# EAGLE board DCO (EAGLE 6.5.0)
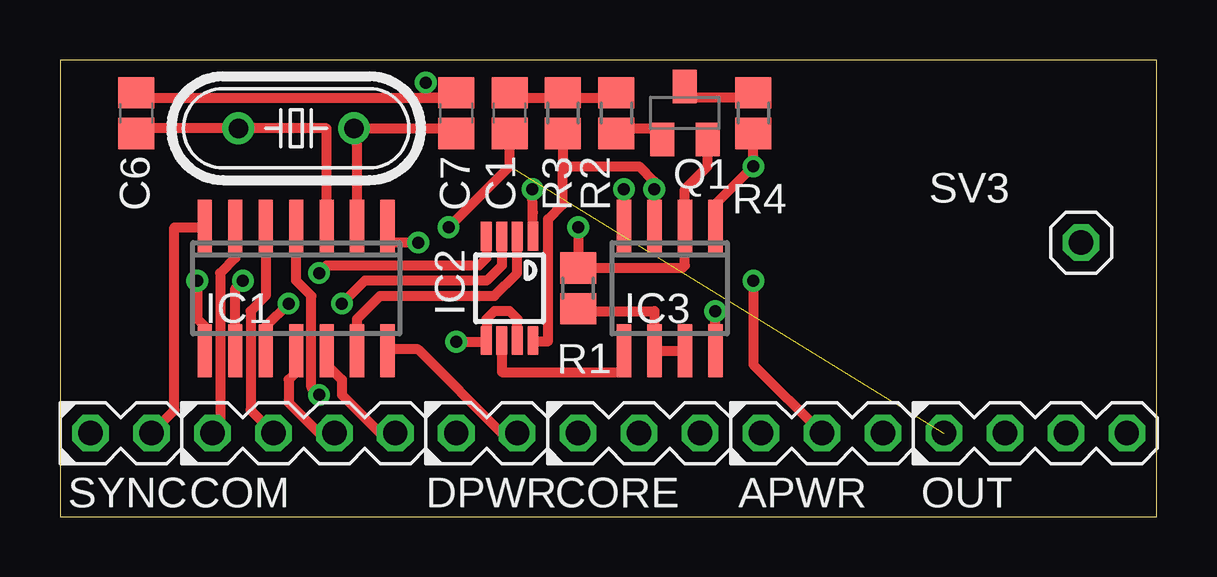
[diagram p0: board, top side]
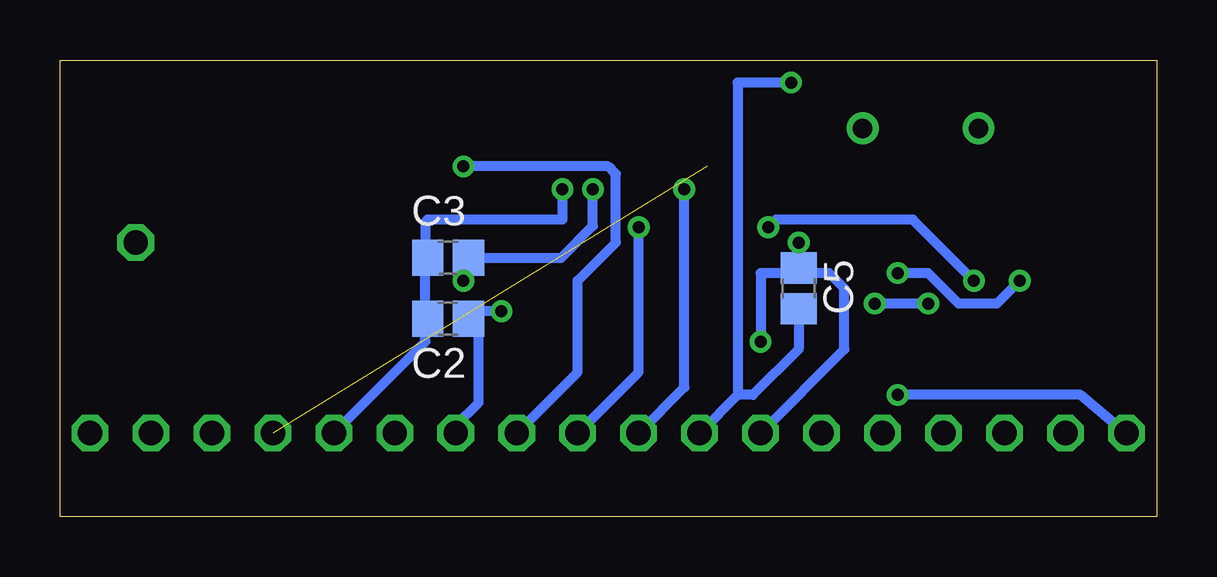
[diagram p1: board, bottom side, seen from below]

Size 45.7 x 19.04 mm. Coordinates in mm from the lower left corner, seen from the top.
Outline: 0,0 45.7,0 45.7,19.04 0,19.04 0,0
Copper layers (1*16): Top 0.035mm / dielectric 1.5mm / Bottom 0.035mm
Design rules "default": minimum track width 10mil, minimum drill 24mil, track to track 8mil, track to pad 8mil, pad to pad 8mil, via to via 8mil, smd to smd 8mil, copper to edge 40mil, drill to drill 8mil, minimum pad ring 10mil, minimum via ring 8mil, stop-mask expansion 4mil, vias tented up to drill 0mil, thermal gap 10mil

## Footprints (pad centres in the part's own frame; a part is rotated, then mirrored left to right if it is on the bottom)
MA03-1J = drill 1.016 octagon: 1 -2.54,0; 2 0,0; 3 2.54,0
C0805 = smd 1.3 x 1.5: 1 -0.85,0; 2 0.85,0
MA04-1J = drill 1.016 octagon: 1 -3.81,0; 2 -1.27,0; 3 1.27,0; 4 3.81,0
MA02-1J = drill 1.016 octagon: 1 -2.54,0; 2 0,0
SO14J = smd 0.6 x 2.2: 1 -3.81,-2.6; 2 -2.54,-2.6; 3 -1.27,-2.6; 4 0,-2.6; 5 1.27,-2.6; 6 2.54,-2.6; 7 3.81,-2.6; 8 3.81,2.6; 9 2.54,2.6; 10 1.27,2.6; 11 0,2.6; 12 -1.27,2.6; 13 -2.54,2.6; 14 -3.81,2.6
UMAX8J = smd 0.45 x 1.2: 1 -0.975,-2.175; 2 -0.325,-2.175; 3 0.325,-2.175; 4 0.975,-2.175; 5 0.975,2.175; 6 0.325,2.175; 7 -0.325,2.175; 8 -0.975,2.175
SO08 = smd 0.6 x 2.2: 1 -1.905,-2.6; 2 -0.635,-2.6; 3 0.635,-2.6; 4 1.905,-2.6; 5 1.905,2.6; 6 0.635,2.6; 7 -0.635,2.6; 8 -1.905,2.6
MA05-1J = drill 1.016 octagon: 1 -5.08,0; 2 -2.54,0; 3 0,0; 4 2.54,0; 5 5.08,0
SOT23-BEC = smd 1 x 1.4: B -0.95,-1.1; C 0,1.1; E 0.95,-1.1
HC49/S = drill 0.813: 1 -2.413,0; 2 2.413,0
R0805 = smd 1.3 x 1.5: 1 -0.85,0; 2 0.85,0
MA01-1J = drill 1.016 octagon: 1 0,0

## Placement (x,y rotation side)
APWR  [MA03-1J]  31.75,3.49 0 top
C1  270pF  [C0805]  18.73,16.83 90 top
C2  100nF  [C0805]  29.53,8.26 180 bottom
C3  100nF  [C0805]  29.53,10.79 0 bottom
C5  100nF  [C0805]  14.92,9.53 270 bottom
C6  [C0805]  3.17,16.83 270 top
C7  [C0805]  16.51,16.83 270 top
COM  [MA04-1J]  10.16,3.49 0 top
CORE  [MA03-1J]  24.13,3.49 0 top
DPWR  [MA02-1J]  19.05,3.49 0 top
IC1  PIC16F18325SL  [SO14J]  9.84,9.53 180 top
IC2  MAX5216  [UMAX8J]  18.73,9.53 180 top
IC3  TL082D  [SO08]  25.4,9.53 180 top
OUT  [MA04-1J]  40.64,3.49 0 top
PGM  [MA05-1J]  -34.29,-22.86 0 top  (outside the outline)
Q1  MMBT3906  [SOT23-BEC]  26.04,16.83 0 top
Q2  [HC49/S]  9.84,16.19 0 top
R1  100k  [R0805]  21.59,9.53 90 top
R2  1k  [R0805]  23.18,16.83 90 top
R3  10k  [R0805]  20.95,16.83 90 top
R4  2R2  [R0805]  28.89,16.83 90 top
SV3  [MA01-1J]  42.55,11.43 0 top
SYNC  [MA02-1J]  3.81,3.49 0 top

## Library data of the parts
APWR COM CORE OUT PGM = joakim; OC_FARNELL: unknown; OC_NEWARK: unknown
C1-C3 C5-C7 R1-R4 = resistor
DPWR IC2 SV3 SYNC = joakim
IC1 = joakim; MF: MICROCHIP; MPN: PIC16F676-I/SL; OC_FARNELL: 9760520; OC_NEWARK: 92C4557
IC3 = linear
Q1 = transistor-pnp
Q2 = crystal; OC_FARNELL: 1667008; OC_NEWARK: unknown

## Nets
+5V: C5.1 DPWR.1 IC1.1 IC2.5 IC2.7
+15V: APWR.1 C2.1 IC3.8
-15V: APWR.2 C3.2 IC3.4
AGND: APWR.3 C2.2 C3.1 IC2.8 IC3.3 R3.1
CAP1: CORE.2 IC3.2 Q1.E R1.2
CAP2: CORE.3 IC3.1 R4.1
CHARGE_VOLTAGE: IC2.6 IC3.5
CTRL_SPI_CLOCK: COM.1 IC1.6
CTRL_SPI_IN: COM.2 IC1.5
CTRL_SPI_OUT: COM.4 IC1.12
DAC_CS: IC1.13 IC2.2
DAC_REF: CORE.1 IC2.1
DAC_SPI: IC1.8 IC2.4
DAC_SPI_CLOCK: IC1.10 IC2.3
DATA_READY: COM.3 IC1.11
DGND: C5.2 C6.1 C7.1 DPWR.2 IC1.14
N$2: Q1.B R2.1
N$3: Q1.C R4.2
N$4: C1.2 R2.2 R3.2
N$5: PGM.1
N$6: PGM.2
N$7: PGM.3
N$8: PGM.4
N$9: PGM.5
N$10: IC3.6 IC3.7 R1.1
OSC1: C7.2 IC1.2 Q2.2
OSC2: C6.2 IC1.3 Q2.1
PULSE_OUT: OUT.3
PWM: SV3.1
SAW_OUT: OUT.2
SUB_OSC_OUT: OUT.4
SYNC: IC1.7 SYNC.2
SYNC_POLARITY: IC1.4 SYNC.1
TIMER_OUT: C1.1 IC1.9 OUT.1

## Tracks (layer width: path | path; a pad name or v marks a point on that pad's centre or on a via)
+5V  (via drill 0.5)
  Top 0.406: 13.71,12.06 IC1.1 13.65,11.43 v14.92,11.43 | IC2.7 19.06,8.25 18.73,8.57 18.1,8.57 17.78,8.26 17.78,7.37 IC2.5 17.71,7.3 v16.51,7.3
  Bottom 0.406: v14.92,11.43 C5.1 | C5.1 14.92,10.16 16.51,10.16 v16.51,7.3 | C5.1 14.71,10.16 13.65,10.16 13.02,9.53 13.02,6.99 DPWR.1
+15V  (via drill 0.5)
  Top 0.406: IC3.8 v27.3,8.57
  Bottom 0.406: v27.3,8.57 28.26,8.57 28.26,8.15 | 28.26,8.15 28.26,7.62 | 28.26,7.62 C2.1 28.26,8.15 | APWR.1 29.21,3.81 28.26,4.76 28.26,7.62
-15V  (via drill 0.5)
  Top 0.406: v23.5,13.65 IC3.4 | v28.89,9.84 28.89,6.35 APWR.2
  Bottom 0.406: v23.5,13.65 IC3.4 24.82,10.79 28.89,10.79 v28.89,9.84 C3.2
AGND  (via drill 0.5)
  Top 0.406: IC2.8 19.75,7.3 20.32,7.3 20.34,7.33 20.34,12.4 20.95,13.02 20.95,14.61 | IC3.3 v24.77,13.65 24.77,13.97 24.13,14.61 20.95,14.61 | R3.1 20.95,14.61
  Bottom 0.406: v24.77,13.65 24.77,12.38 30.38,12.38 30.48,12.28 30.48,10.9 | APWR.3 30.48,7.3 30.48,8.15 | 30.48,8.15 30.48,10.9 | 30.48,8.15 C2.2 | 30.48,10.9 C3.1
CAP1  (via drill 0.5)
  Top 0.406: v21.59,12.06 R1.2 25.93,10.38 26.04,10.48 IC3.2 26.04,13.65 26.99,14.61 Q1.E
  Bottom 0.406: CORE.2 21.59,6.03 v21.59,12.06
CAP2  (via drill 0.5)
  Top 0.406: R4.1 v28.89,14.61 27.3,13.02 IC3.1
  Bottom 0.406: CORE.3 24.13,6.03 24.13,9.84 22.54,11.43 22.54,14.29 22.86,14.61 v28.89,14.61
CHARGE_VOLTAGE
  Top 0.406: IC2.6 18.41,6.04 18.41,6.03 23.5,6.03 IC3.5
CTRL_SPI_CLOCK
  Top 0.406: IC1.6 7.3,10.79 6.67,10.16 6.67,3.81 COM.1
CTRL_SPI_IN
  Top 0.406: IC1.5 8.57,9.21 7.94,8.57 7.94,4.45 COM.2
CTRL_SPI_OUT
  Top 0.406: IC1.12 11.11,6.35 11.75,5.71 11.75,5.08 13.34,3.49 COM.4
DAC_CS
  Top 0.406: IC1.13 12.38,8.26 13.34,9.21 18.1,9.21 19.05,10.16 IC2.2
DAC_REF  (via drill 0.5)
  Top 0.406: IC2.1 19.71,12.68 v19.68,13.65
  Bottom 0.406: CORE.1 19.68,5.4 v19.68,13.65
DAC_SPI  (via drill 0.5)
  Top 0.406: v5.71,9.84 5.71,8.26 6.03,7.94 IC1.8 | v10.79,10.16 11.11,10.48 17.46,10.48 17.78,10.79 17.78,11.68 IC2.4
  Bottom 0.406: v5.71,9.84 6.67,8.89 8.26,8.89 9.53,10.16 v10.79,10.16
DAC_SPI_CLOCK  (via drill 0.5)
  Top 0.406: IC2.3 18.41,10.47 17.78,9.84 12.7,9.84 v11.75,8.89 | v9.53,8.89 8.57,7.94 IC1.10
  Bottom 0.406: v9.53,8.89 v11.75,8.89
DATA_READY
  Top 0.406: IC1.11 9.84,6.03 9.53,5.71 9.53,4.76 10.79,3.49 COM.3
DGND  (via drill 0.5)
  Top 0.406: C6.1 3.17,17.46 16.73,17.46 C7.1 16.51,17.46 15.24,17.46 v15.24,18.1 | IC1.14 13.71,6.99 14.92,6.99 18.41,3.49 DPWR.2
  Bottom 0.406: C5.2 14.92,6.99 16.83,5.08 17.46,5.08 | v15.24,18.1 17.46,18.1 17.46,5.08 | 17.46,5.08 DPWR.2
N$2
  Top 0.406: R2.1 23.18,16.19 24.62,16.19 Q1.B
N$3
  Top 0.406: R4.2 28.89,17.46 26.04,17.46 Q1.C
N$4
  Top 0.406: 19.05,17.78 C1.2 19.05,17.46 21.38,17.46 R3.2 21.59,17.46 22.96,17.46 R2.2
N$10
  Top 0.406: R1.1 21.59,8.57 24.77,8.57 IC3.6 IC3.7
OSC1
  Top 0.406: IC1.2 12.38,16.19 Q2.2 16.41,16.19 C7.2
OSC2
  Top 0.406: IC1.3 11.11,16.19 Q2.1 3.28,16.19 C6.2
SYNC
  Top 0.406: IC1.7 6.03,12.06 4.76,12.06 4.76,4.45 SYNC.2
SYNC_POLARITY  (via drill 0.5)
  Top 0.406: v10.79,5.08 10.48,5.4 10.48,9.21 9.84,9.84 IC1.4
  Bottom 0.406: v10.79,5.08 3.17,5.08 SYNC.1
TIMER_OUT  (via drill 0.5)  (1 unrouted)
  Top 0.406: IC1.9 7.3,9.53 v7.62,9.84 | v16.19,12.06 18.73,14.61 C1.1
  Bottom 0.406: v7.62,9.84 10.16,12.38 15.88,12.38 v16.19,12.06